# EAGLE board esp32-driver (EAGLE 9.6.2)
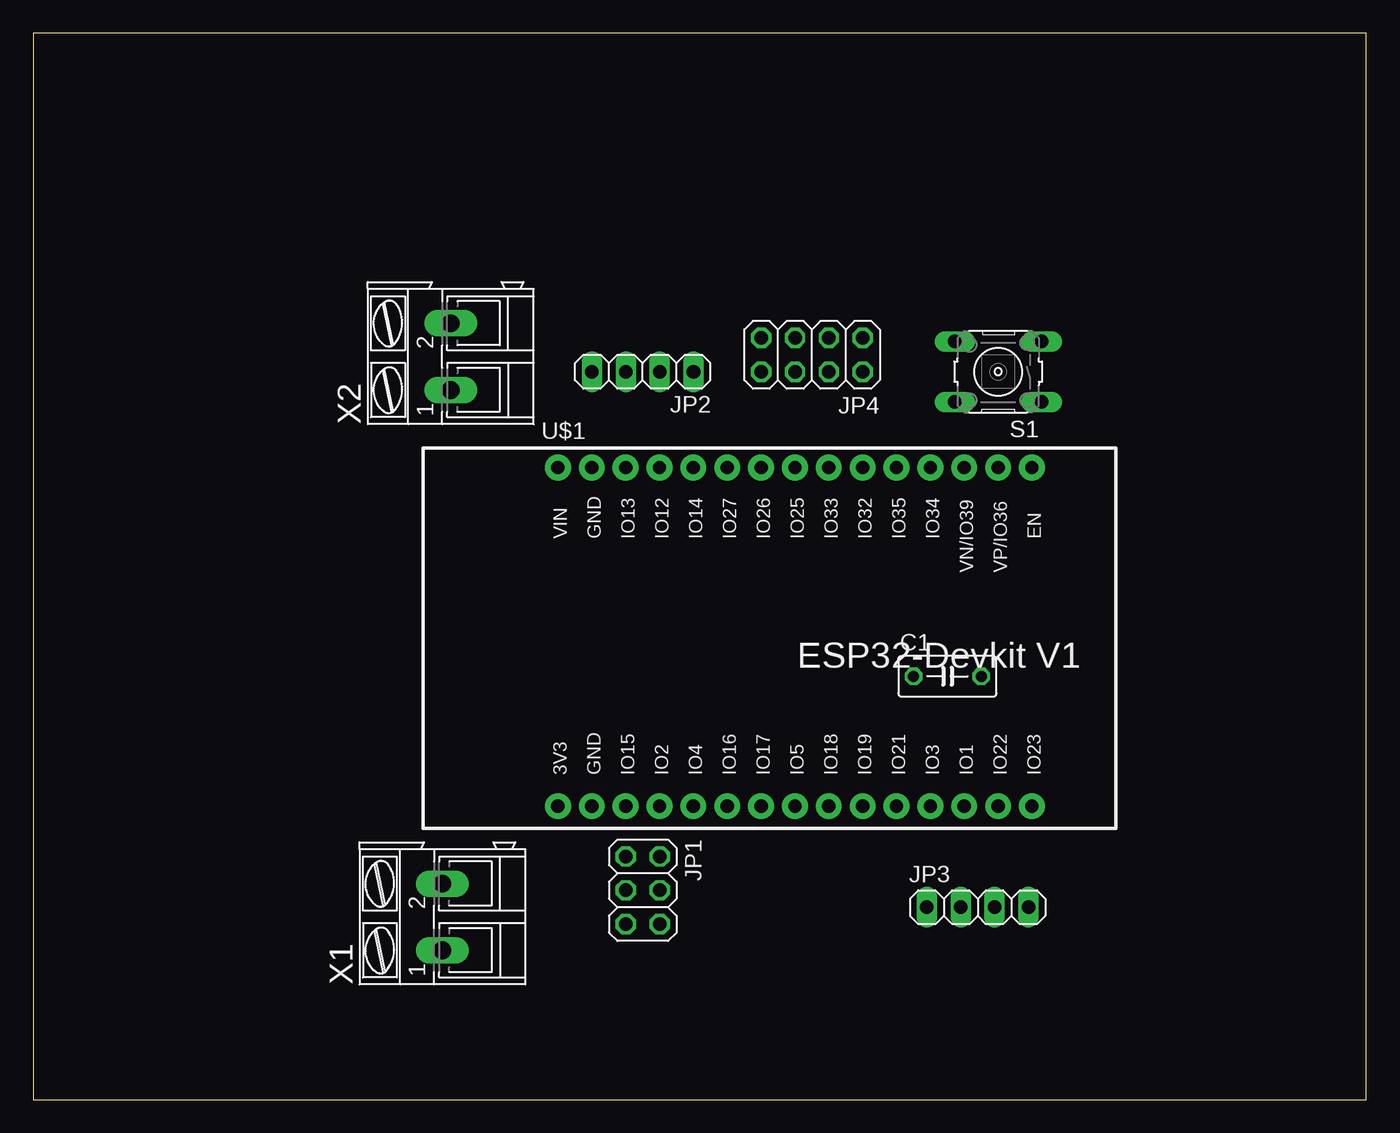
[diagram p0: board, top side]
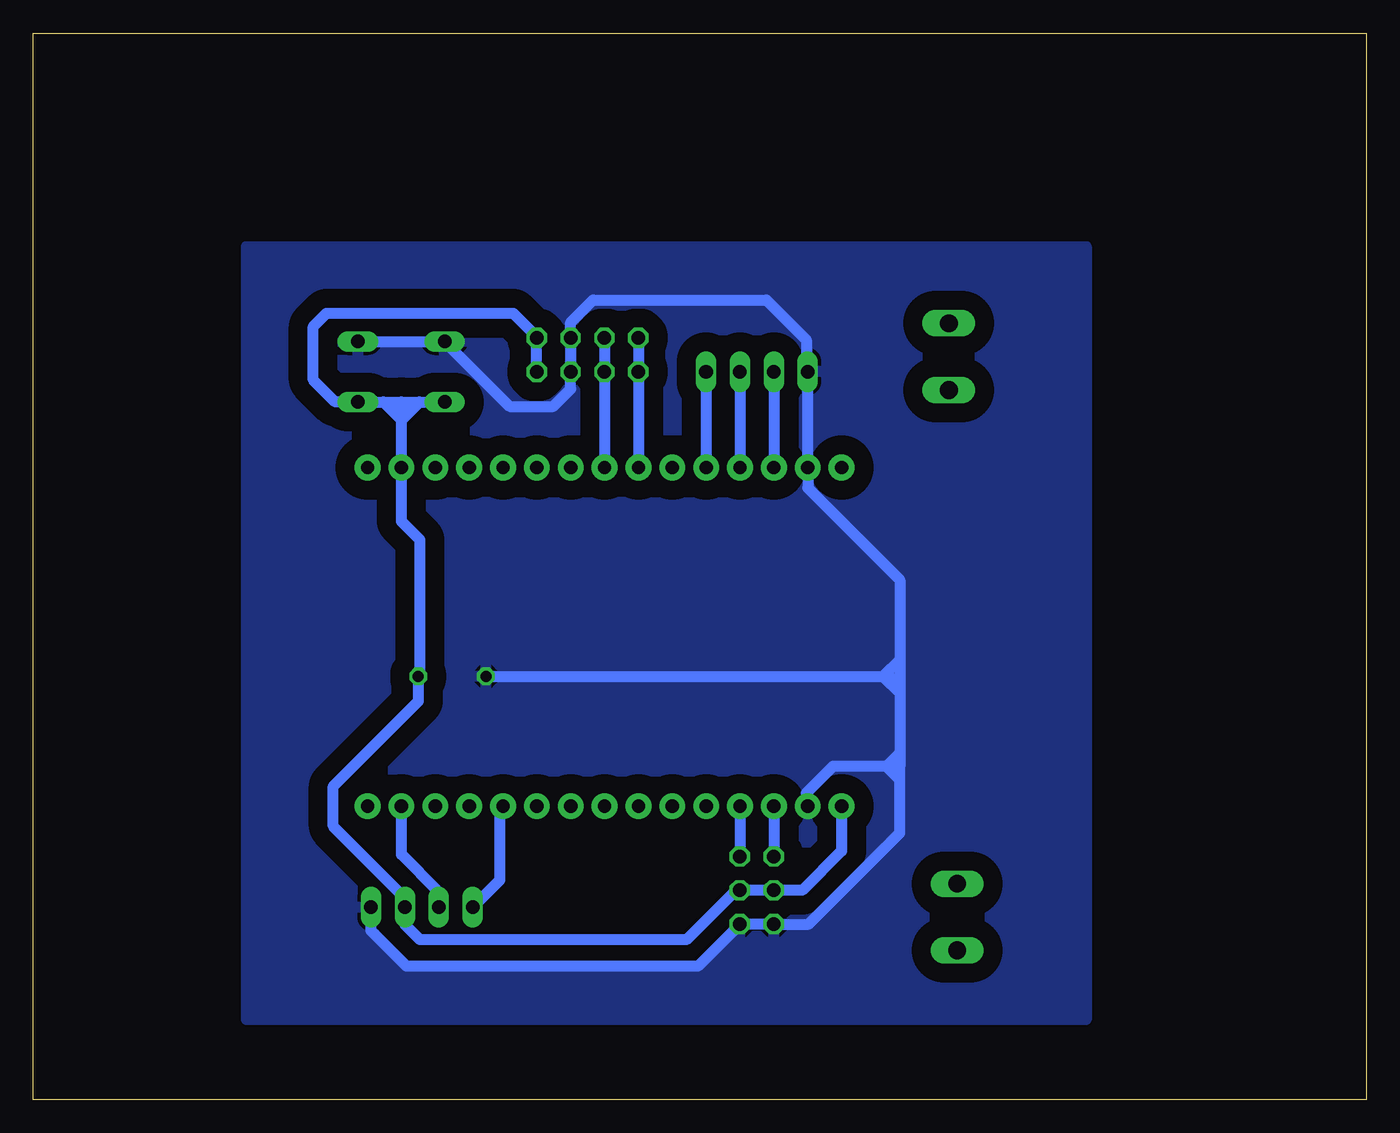
[diagram p1: board, bottom side, seen from below]

Size 100 x 80 mm. Coordinates in mm from the lower left corner, seen from the top.
Outline: 0,0 100,0 100,80 0,80 0,0
Copper layers (1*16): Top 0.035mm / dielectric 1.5mm / Bottom 0.035mm
Design rules "default": minimum track width 6mil, minimum drill 0.35mm, track to track 6mil, track to pad 6mil, pad to pad 6mil, via to via 6mil, smd to smd 6mil, copper to edge 40mil, drill to drill 6mil, minimum pad ring 10mil, minimum via ring 8mil, stop-mask expansion 4mil, vias tented up to drill 0mil, thermal gap 10mil

## Footprints (pad centres in the part's own frame; a part is rotated, then mirrored left to right if it is on the bottom)
C050-030X075 = drill 0.813 octagon: 1 -2.54,0; 2 2.54,0
2X03 = drill 1.016 octagon: 1 -2.54,-1.27; 2 -2.54,1.27; 3 0,-1.27; 4 0,1.27; 5 2.54,-1.27; 6 2.54,1.27
1X04 = drill 1.016 long: 1 -3.81,0; 2 -1.27,0; 3 1.27,0; 4 3.81,0
2X04 = drill 1.016 octagon: 1 -3.81,-1.27; 2 -3.81,1.27; 3 -1.27,-1.27; 4 -1.27,1.27; 5 1.27,-1.27; 6 1.27,1.27; 7 3.81,-1.27; 8 3.81,1.27
B3F-10XX = drill 1.016 long: 1 -3.251,2.261; 2 3.251,2.261; 3 -3.251,-2.261; 4 3.251,-2.261
ESP32-DEVKITV1 = drill 1 pad 1.93: 3V3 -16.52,-12.27; D1 13.96,-12.27; D2 -8.9,-12.27; D3 11.42,-12.27; D4 -6.36,-12.27; D5 1.26,-12.27; D12 -8.9,13.135; D13 -11.44,13.135; D14 -6.36,13.135; D15 -11.44,-12.27; D16 -3.82,-12.27; D17 -1.28,-12.27; D18 3.8,-12.27; D19 6.34,-12.27; D21 8.88,-12.27; D22 16.5,-12.27; D23 19.04,-12.27; D25 1.26,13.135; D26 -1.28,13.135; D27 -3.82,13.135; D32 6.34,13.135; D33 3.8,13.135; D34 11.42,13.135; D35 8.88,13.135; D36 16.5,13.135; D39 13.96,13.135; EN 19.04,13.135; GND@1 -13.98,13.135; GND@2 -13.98,-12.27; VIN -16.52,13.135
AK300/2 = drill 1.321 long: 1 -2.515,0; 2 2.489,0

## Placement (x,y rotation side)
C1  [C050-030X075]  68.58,31.75 0 top
JP1  [2X03]  45.72,15.7 270 top
JP2  [1X04]  45.72,54.61 180 top
JP3  [1X04]  70.85,14.43 0 top
JP4  [2X04]  58.42,55.88 180 top
S1  [B3F-10XX]  72.39,54.61 180 top
U$1  ESP32DEVKITV1  [ESP32-DEVKITV1]  55.88,34.29 0 top
X1  [AK300/2]  30.7,13.71 90 top
X2  [AK300/2]  31.31,55.75 90 top

## Library data of the parts
C1 = rcl; SPICEPREFIX: C
JP1-JP4 = pinhead
S1 = switch-omron; MPN: B3F-1000; OC_FARNELL: 176432; OC_NEWARK: 36M3542
U$1 = esp32-devkitv1
X1 X2 = con-ptr500; OC_FARNELL: unknown; OC_NEWARK: unknown

## Nets
GND: C1.1 JP1.5 JP1.6 JP2.4 JP3.4 JP4.3 JP4.4 S1.3 S1.4 U$1.GND@1 U$1.GND@2
MOISTURE: JP1.2 U$1.D2
OUT1: JP2.1 U$1.D14
OUT2: JP2.2 U$1.D12
OUT3: JP2.3 U$1.D13
PH: JP1.1 U$1.D15
SCL: JP3.2 U$1.D22
SCL2: JP4.5 JP4.6 U$1.D25
SDA: JP3.1 U$1.D21
SDA2: JP4.7 JP4.8 U$1.D26
V: C1.2 JP1.3 JP1.4 JP3.3 JP4.1 JP4.2 S1.1 S1.2 U$1.3V3 U$1.D36
VIN: U$1.VIN

## Tracks (layer width: path | path; a pad name or v marks a point on that pad's centre or on a via)
GND
  Bottom 0.813: S1.3 S1.4 64.27,52 61,52 59.69,53.31 JP4.4 JP4.3 59.69,58.31 58,60 45,60 42,57 42,54 41.91,54.09 JP2.4 41.91,47.44 U$1.GND@1 41.9,45.9 35,39 35,33 | 44.29,13 JP1.5 | 35,33 35,31 | 35,31 35,30.5 | 35,30.5 35,26 | 35,26 35,25 | JP1.5 JP1.6 50.15,10 72,10 74.66,12.66 JP3.4 | 35,25 36,25 | 36,25 40,25 42,23 42,22.12 U$1.GND@2 | 35,26 36,25 | 35,33 36.25,31.75 | C1.1 36.25,31.75 | 35,31 35.75,31.75 36.25,31.75 | 36.25,31.75 35,30.5 | JP1.5 41.84,13.16 35,20 35,24 | 35,24 35,25 | 36,25 35,24
  pour Bottom (isolate 1.422): 21,64 21,6 84,6 84,62 84,64
MOISTURE
  Bottom 0.813: U$1.D2 JP1.2
OUT1
  Bottom 0.813: JP2.1 49.53,47.44 U$1.D14
OUT2
  Bottom 0.813: JP2.2 46.99,47.44 U$1.D12
OUT3
  Bottom 0.813: JP2.3 44.45,47.44 U$1.D13
PH
  Bottom 0.813: U$1.D15 JP1.1
SCL
  Bottom 0.813: JP3.2 69.58,15.58 72.38,18.38 U$1.D22
SCL2
  Bottom 0.813: JP4.5 JP4.6 57.15,47.44 U$1.D25
SDA
  Bottom 0.813: JP3.1 65,16.47 65,21.78 U$1.D21
SDA2
  Bottom 0.813: JP4.7 JP4.8 54.61,47.44 U$1.D26
V
  Bottom 0.813: JP4.2 JP4.1 62.23,57.23 64,59 78,59 79,58 79,54 77.35,52.35 S1.1 73.73,52.35 | 73.73,52.35 72.38,52.35 | 72.38,52.35 71.03,52.35 | 71.03,52.35 S1.2 | 72.38,52.35 72.38,51 | 72.38,51 U$1.D36 72.38,43.38 71,42 71,31.87 C1.2 71.12,29.88 77.5,23.5 77.5,20.5 72,15 72.12,14.88 JP3.3 72.12,13.12 71,12 51,12 47.3,15.7 JP1.4 JP1.3 42.3,15.7 39.36,18.64 U$1.3V3 | 71.03,52.35 72.38,51 | 72.38,51 73.73,52.35